# EAGLE board PrimeiroPrj (EAGLE 9.7.0)

Size 159.75 x 90.78 mm. Coordinates in mm from the lower left corner, seen from the top.
Outline: 0,0 159.75,0 159.75,90.78 0,90.78 0,0
Copper layers (1*16): Top 0.035mm / dielectric 1.5mm / Bottom 0.035mm
Design rules "default": minimum track width 6mil, minimum drill 0.35mm, track to track 6mil, track to pad 6mil, pad to pad 6mil, via to via 6mil, smd to smd 6mil, copper to edge 40mil, drill to drill 6mil, minimum pad ring 10mil, minimum via ring 8mil, stop-mask expansion 4mil, vias tented up to drill 0mil, thermal gap 10mil

## Footprints (pad centres in the part's own frame; a part is rotated, then mirrored left to right if it is on the bottom)
BATTERY-GENERIC = drill 1.118 pad 3.15 octagon: + 2.54,0; - -2.54,0
LEDRD254W60D565H860B_G = drill 0.981 pad 1.581: 1 -1.27,0; 2 1.27,0
LEDRD254W60D565H860B = drill 0.981 pad 1.581: 1 -1.27,0; 2 1.27,0
1X02 = drill 1.016 long: 1 -1.27,0; 2 1.27,0
RESAD1016W63L850D250B = drill 0.83 pad 1.43: 1 -5.08,0; 2 5.08,0
SWITCH-MOMENTARY-PTH-6.5MM = drill 1.016 pad 1.88: 1 -3.251,2.261; 2 3.251,2.261; 3 -3.251,-2.261; 4 3.251,-2.261
ARDUINO-UNO-R3-SHIELD = drill 1.016 pad 1.88: 3.3V 24.13,-2.54; 5V 24.13,0; A0 24.13,12.7; A1 24.13,15.24; A2 24.13,17.78; A3 24.13,20.32; A4 24.13,22.86; A5 24.13,25.4; AREF -24.13,-13.97; D2 -24.13,20.32; D3 -24.13,17.78; D4 -24.13,15.24; D5 -24.13,12.7; D6 -24.13,10.16; D7 -24.13,7.62; D8 -24.13,3.81; D9 -24.13,1.27; D10 -24.13,-1.27; D11 -24.13,-3.81; D12 -24.13,-6.35; D13 -24.13,-8.89; GND@0 24.13,2.54; GND@1 24.13,5.08; GND@2 -24.13,-11.43; IOREF 24.13,-7.62; NC 24.13,-10.16; RES 24.13,-5.08; RX -24.13,25.4; SCL -24.13,-19.05; SDA -24.13,-16.51; TX -24.13,22.86; VIN 24.13,7.62

## Placement (x,y rotation side)
BAT1  POTATO  [BATTERY-GENERIC]  82.07,8.26 0 top
D1  GREEN  [LEDRD254W60D565H860B_G]  152.15,35.19 180 top
DLED  RED  [LEDRD254W60D565H860B]  121.67,35.19 180 top
L1  LIGHTBULB  [1X02]  127.66,84.5 0 top
R1  1k  [RESAD1016W63L850D250B]  153.42,45.35 90 top
R2  1k  [RESAD1016W63L850D250B]  140.72,45.35 90 top
RRESISTOR  1k  [RESAD1016W63L850D250B]  122.94,45.35 90 top
S1  SWITCH_MOMENTARY  [SWITCH-MOMENTARY-PTH-6.5MM]  150.88,56.78 90 top
S2  SWITCH_MOMENTARY  [SWITCH-MOMENTARY-PTH-6.5MM]  138.18,56.78 90 top
UEXER1  ARDUINO-UNO-R3-SHIELD  [ARDUINO-UNO-R3-SHIELD]  47.88,59.99 270 top

## Library data of the parts
BAT1 L1 R1 R2 RRESISTOR S1 S2 UEXER1 = Tinkercad
D1 = Tinkercad; CATEGORY: Opto-Electronic; SUB-CATEGORY: LED; VALUE: LED_GREEN
DLED = Tinkercad; CATEGORY: Opto-Electronic; SUB-CATEGORY: LED; VALUE: LED_RED

## Nets
D1_A: D1.1 R1.1
DLED_A: DLED.1 RRESISTOR.1
L1_2: L1.2 R2.1
S1_4: R1.2 S1.3 S1.4
S2_3: R2.2 S2.3 S2.4
UEXER1_5V: S1.1 S1.2 S2.1 S2.2 UEXER1.5V
UEXER1_D7: RRESISTOR.2 UEXER1.D7
UEXER1_GND: D1.2 DLED.2 L1.1 UEXER1.GND@0 UEXER1.GND@1 UEXER1.GND@2

## Tracks (layer width: path | path; a pad name or v marks a point on that pad's centre or on a via)
D1_A  (1 unrouted)
DLED_A  (1 unrouted)
L1_2  (1 unrouted)
S1_4  (2 unrouted)
S2_3  (2 unrouted)
UEXER1_5V  (4 unrouted)
UEXER1_D7  (1 unrouted)
UEXER1_GND  (5 unrouted)